# Altium PCB STM32F302VC_EVM.PcbDoc (part 13 of 19)
Units mil, origin at the board's own origin, x right, y up, seen from the top; angles counter-clockwise.
Board outline 3937.01 x 3937.01 mil, 2 copper layers (Top Layer, Bottom Layer); 117 components, 166 nets, 602 pads, 373 vias.
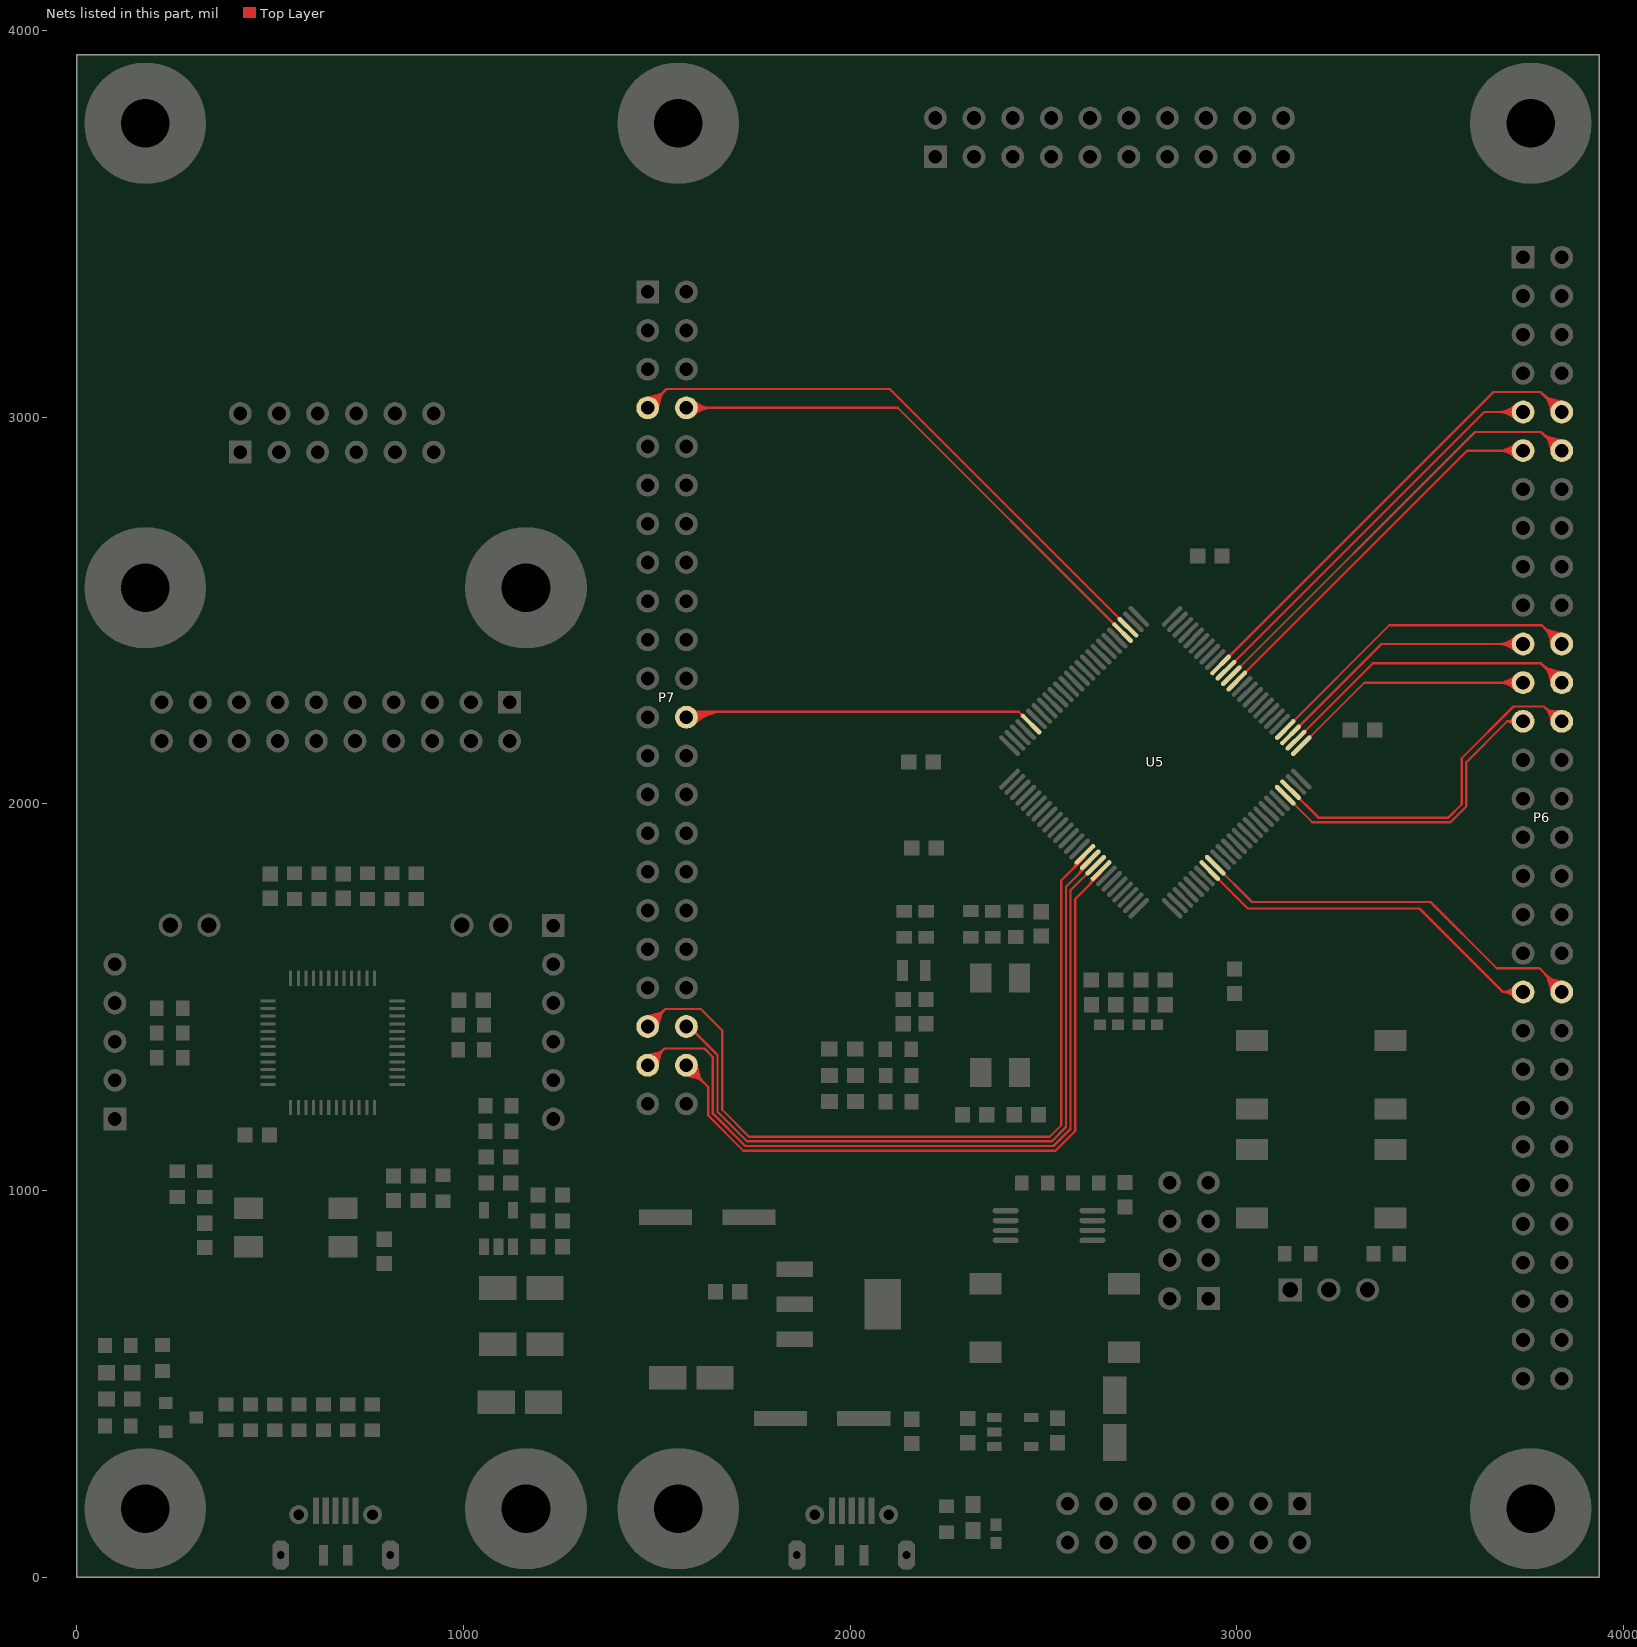
[diagram p13: the nets of this part, all layers, seen from the top]

## Via types
v1: diameter 23.62, hole 11.81, Top Layer to Bottom Layer, tented both sides, 372 vias
v2: diameter 50, hole 28, Top Layer to Bottom Layer, tented both sides, 1 vias

## Nets (pads, with @x,y where several pads share a name; then routed paths per layer and width w, separated by ;. In a path a pad name is that pad's centre, name@x,y a point inside that pad or via, vN(x,y) a via of type N, cw(c..) or ccw(c..) an arc to the next point about the centre after c; other vN are vias at no path point) (continued)
PB9: P7.24 U5.96 | length 2039.9
  Top Layer w6: P7.24@1576.38,2224.02 1590.55,2238.19 2435.75,2238.19 U5.96@2467.83,2206.11 ; P7.24@1578.17,2222.23 cw(c1616.7,2183.7) 1616.7,2238.19 ; P7.24@1578.17,2222.23 cw(c1616.7,2183.7) 1616.7,2238.19 ; P7.24@1578.17,2222.23 cw(c1616.7,2183.7) 1616.7,2238.19 ; P7.24@1582.41,2217.99 cw(c1631.18,2169.21) 1631.18,2238.19 ; P7.24@1582.41,2217.99 cw(c1631.18,2169.21) 1631.18,2238.19 ; P7.24@1582.41,2217.99 cw(c1631.18,2169.21) 1631.18,2238.19 ; P7.24@1586.65,2213.74 cw(c1645.67,2154.73) 1645.67,2238.19 ; P7.24@1586.65,2213.74 cw(c1645.67,2154.73) 1645.67,2238.19 ; P7.24@1586.65,2213.74 cw(c1645.67,2154.73) 1645.67,2238.19 ; P7.24@1590.89,2209.5 cw(c1660.15,2140.24) 1660.15,2238.19 ; P7.24@1590.89,2209.5 cw(c1660.15,2140.24) 1660.15,2238.19 ; P7.24@1590.89,2209.5 cw(c1660.15,2140.24) 1660.15,2238.19 ; P7.24@1595.14,2205.26 cw(c1674.64,2125.76) 1674.64,2238.19 ; P7.24@1595.14,2205.26 cw(c1674.64,2125.76) 1674.64,2238.19 ; P7.24@1595.14,2205.26 cw(c1674.64,2125.76) 1674.64,2238.19 ; P7.24@1595.14,2242.77 ccw(c1606.2,2253.84) 1606.2,2238.19 ; P7.24@1595.14,2242.77 ccw(c1606.2,2253.84) 1606.2,2238.19 ; P7.24@1595.14,2242.77 ccw(c1606.2,2253.84) 1606.2,2238.19 ; P7.24@1602.05,2217.34 cw(c1617.58,2213.3) 1609.45,2227.13 ; P7.24@1602.05,2217.34 cw(c1617.58,2213.3) 1609.45,2227.13 ; P7.24@1602.05,2217.34 cw(c1617.58,2213.3) 1609.45,2227.13 ; P7.24@1602.89,2222.98 cw(c1615.54,2222.49) 1609.21,2233.46 ; P7.24@1602.89,2222.98 cw(c1615.54,2222.49) 1609.21,2233.46 ; P7.24@1602.89,2222.98 cw(c1615.54,2222.49) 1609.21,2233.46 ; 2441.99,2231.95 cw(c2437.03,2226.99) U5.96@2444.05,2226.99 ; 2441.99,2231.95 ccw(c2446.95,2236.91) U5.96@2446.95,2229.9 ; 2441.99,2231.95 ccw(c2446.95,2236.91) U5.96@2446.95,2229.9 ; 2441.99,2231.95 cw(c2437.03,2226.99) U5.96@2444.05,2226.99 ; 2441.99,2231.95 ccw(c2446.95,2236.91) U5.96@2446.95,2229.9 ; 2441.99,2231.95 cw(c2437.03,2226.99) U5.96@2444.05,2226.99
PB10: P6.25 U5.47 | length 1074.3
  Top Layer w6: U5.47@3124.83,2022.37 3194.86,1952.34 3552.12,1952.34 3593.51,1993.73 3593.51,2107.52 3699.37,2213.39 ; P6.25@3740.16,2213.39 3699.37,2213.39 ; U5.47@3145.71,1998.59 cw(c3145.71,1991.58) 3150.67,1996.54 ; U5.47@3145.71,1998.59 cw(c3145.71,1991.58) 3150.67,1996.54 ; U5.47@3145.71,1998.59 cw(c3145.71,1991.58) 3150.67,1996.54 ; U5.47@3148.61,2001.5 ccw(c3155.63,2001.5) 3150.67,1996.54 ; U5.47@3148.61,2001.5 ccw(c3155.63,2001.5) 3150.67,1996.54 ; U5.47@3148.61,2001.5 ccw(c3155.63,2001.5) 3150.67,1996.54 ; 3699.37,2213.39 cw(c3699.37,2195.29) P6.25@3715.91,2202.63 ; 3699.37,2213.39 ccw(c3699.37,2231.48) P6.25@3715.91,2224.14 ; 3699.37,2213.39 ccw(c3699.37,2231.48) P6.25@3715.91,2224.14 ; 3699.37,2213.39 cw(c3699.37,2195.29) P6.25@3715.91,2202.63 ; 3699.37,2213.39 ccw(c3699.37,2231.48) P6.25@3715.91,2224.14 ; 3699.37,2213.39 cw(c3699.37,2195.29) P6.25@3715.91,2202.63 ; 3708.6,2213.39 cw(c3708.6,2199.38) P6.25@3721.39,2205.06 ; 3708.6,2213.39 ccw(c3708.6,2227.39) P6.25@3721.39,2221.71 ; 3708.6,2213.39 ccw(c3708.6,2227.39) P6.25@3721.39,2221.71 ; 3708.6,2213.39 cw(c3708.6,2199.38) P6.25@3721.39,2205.06 ; 3708.6,2213.39 ccw(c3708.6,2227.39) P6.25@3721.39,2221.71 ; 3708.6,2213.39 cw(c3708.6,2199.38) P6.25@3721.39,2205.06
PB11: P6.26 U5.48 | length 1965.5
  Top Layer w6: U5.48@3138.75,2036.29 3210.7,1964.34 3547.15,1964.34 3581.51,1998.7 3581.51,2118.11 3715.31,2251.91 3793.36,2251.91 ; P6.26@3836.02,2209.25 3793.36,2251.91 ; U5.48@3159.63,2012.51 cw(c3159.63,2005.5) 3164.59,2010.46 ; U5.48@3159.63,2012.51 cw(c3159.63,2005.5) 3164.59,2010.46 ; U5.48@3159.63,2012.51 cw(c3159.63,2005.5) 3164.59,2010.46 ; U5.48@3162.53,2015.42 ccw(c3169.55,2015.42) 3164.59,2010.46 ; U5.48@3162.53,2015.42 ccw(c3169.55,2015.42) 3164.59,2010.46 ; U5.48@3162.53,2015.42 ccw(c3169.55,2015.42) 3164.59,2010.46 ; 3793.36,2251.91 ccw(c3825.8,2284.35) P6.26@3834.9,2239.39 ; 3793.36,2251.91 ccw(c3825.8,2284.35) P6.26@3834.9,2239.39 ; 3793.36,2251.91 ccw(c3825.8,2284.35) P6.26@3834.9,2239.39 ; 3800.72,2244.56 cw(c3769.55,2213.39) P6.26@3813.63,2213.39 ; 3800.72,2244.56 cw(c3769.55,2213.39) P6.26@3813.63,2213.39 ; 3800.72,2244.56 cw(c3769.55,2213.39) P6.26@3813.63,2213.39 ; 3801.27,2244.01 ccw(c3828.46,2271.2) P6.26@3836.09,2233.51 ; 3801.27,2244.01 ccw(c3828.46,2271.2) P6.26@3836.09,2233.51 ; 3801.27,2244.01 ccw(c3828.46,2271.2) P6.26@3836.09,2233.51 ; 3807.26,2237.14 ccw(c3842.89,2246.69) P6.26@3839.87,2209.92 ; 3807.26,2237.14 ccw(c3842.89,2246.69) P6.26@3839.87,2209.92 ; 3807.26,2237.14 ccw(c3842.89,2246.69) P6.26@3839.87,2209.92 ; 3809.18,2236.1 ccw(c3831.12,2258.04) P6.26@3837.28,2227.62 ; 3809.18,2236.1 ccw(c3831.12,2258.04) P6.26@3837.28,2227.62 ; 3809.18,2236.1 ccw(c3831.12,2258.04) P6.26@3837.28,2227.62 ; 3809.47,2228.91 ccw(c3842.15,2237.67) P6.26@3839.38,2203.95 ; 3809.47,2228.91 ccw(c3842.15,2237.67) P6.26@3839.38,2203.95 ; 3809.47,2228.91 ccw(c3842.15,2237.67) P6.26@3839.38,2203.95 ; 3810.96,2234.31 cw(c3790.03,2213.39) P6.26@3819.63,2213.39 ; 3810.96,2234.31 cw(c3790.03,2213.39) P6.26@3819.63,2213.39 ; 3810.96,2234.31 cw(c3790.03,2213.39) P6.26@3819.63,2213.39 ; 3816.44,2234.73 cw(c3813.65,2189.99) P6.26@3847.26,2219.65 ; 3816.44,2234.73 cw(c3813.65,2189.99) P6.26@3847.26,2219.65 ; 3816.44,2234.73 cw(c3813.65,2189.99) P6.26@3847.26,2219.65 ; 3817.29,2240.48 cw(c3814.17,2190.45) P6.26@3851.76,2223.63 ; 3817.29,2240.48 cw(c3814.17,2190.45) P6.26@3851.76,2223.63 ; 3817.29,2240.48 cw(c3814.17,2190.45) P6.26@3851.76,2223.63
PB12: P6.23 U5.51 | length 1374.7
  Top Layer w6: U5.51@3166.59,2150.43 3329.54,2313.39 P6.23@3740.16,2313.39 ; U5.51@3187.47,2174.22 ccw(c3187.47,2181.23) 3192.43,2176.27 ; U5.51@3187.47,2174.22 ccw(c3187.47,2181.23) 3192.43,2176.27 ; U5.51@3187.47,2174.22 ccw(c3187.47,2181.23) 3192.43,2176.27 ; U5.51@3190.37,2171.31 cw(c3197.39,2171.31) 3192.43,2176.27 ; U5.51@3190.37,2171.31 cw(c3197.39,2171.31) 3192.43,2176.27 ; U5.51@3190.37,2171.31 cw(c3197.39,2171.31) 3192.43,2176.27 ; 3676.11,2313.39 cw(c3676.11,2249.34) P6.23@3721.4,2294.63 ; 3676.11,2313.39 ccw(c3676.11,2377.43) P6.23@3721.4,2332.14 ; 3676.11,2313.39 ccw(c3676.11,2377.43) P6.23@3721.4,2332.14 ; 3676.11,2313.39 cw(c3676.11,2249.34) P6.23@3721.4,2294.63 ; 3676.11,2313.39 ccw(c3676.11,2377.43) P6.23@3721.4,2332.14 ; 3676.11,2313.39 cw(c3676.11,2249.34) P6.23@3721.4,2294.63 ; 3690.6,2313.39 cw(c3690.6,2263.83) P6.23@3725.64,2298.87 ; 3690.6,2313.39 ccw(c3690.6,2362.94) P6.23@3725.64,2327.9 ; 3690.6,2313.39 ccw(c3690.6,2362.94) P6.23@3725.64,2327.9 ; 3690.6,2313.39 cw(c3690.6,2263.83) P6.23@3725.64,2298.87 ; 3690.6,2313.39 ccw(c3690.6,2362.94) P6.23@3725.64,2327.9 ; 3690.6,2313.39 cw(c3690.6,2263.83) P6.23@3725.64,2298.87 ; 3705.09,2313.39 cw(c3705.09,2278.31) P6.23@3729.89,2303.11 ; 3705.09,2313.39 ccw(c3705.09,2348.46) P6.23@3729.89,2323.66 ; 3705.09,2313.39 ccw(c3705.09,2348.46) P6.23@3729.89,2323.66 ; 3705.09,2313.39 cw(c3705.09,2278.31) P6.23@3729.89,2303.11 ; 3705.09,2313.39 ccw(c3705.09,2348.46) P6.23@3729.89,2323.66 ; 3705.09,2313.39 cw(c3705.09,2278.31) P6.23@3729.89,2303.11
PB13: P6.24 U5.52 | length 2544.3
  Top Layer w6: U5.52@3152.67,2164.35 3351.5,2363.19 3786.42,2363.19 P6.24@3838.19,2311.42 ; U5.52@3173.55,2188.14 ccw(c3173.55,2195.15) 3178.51,2190.19 ; U5.52@3173.55,2188.14 ccw(c3173.55,2195.15) 3178.51,2190.19 ; U5.52@3173.55,2188.14 ccw(c3173.55,2195.15) 3178.51,2190.19 ; U5.52@3176.45,2185.23 cw(c3183.47,2185.23) 3178.51,2190.19 ; U5.52@3176.45,2185.23 cw(c3183.47,2185.23) 3178.51,2190.19 ; U5.52@3176.45,2185.23 cw(c3183.47,2185.23) 3178.51,2190.19 ; 3788.15,2361.45 ccw(c3840.16,2413.46) P6.24@3840.16,2339.91 ; 3788.15,2361.45 ccw(c3840.16,2413.46) P6.24@3840.16,2339.91 ; 3788.15,2361.45 ccw(c3840.16,2413.46) P6.24@3840.16,2339.91 ; 3797.66,2351.95 cw(c3759.09,2313.39) P6.24@3813.63,2313.39 ; 3797.66,2351.95 cw(c3759.09,2313.39) P6.24@3813.63,2313.39 ; 3797.66,2351.95 cw(c3759.09,2313.39) P6.24@3813.63,2313.39 ; 3798.39,2351.21 ccw(c3840.16,2392.98) P6.24@3840.16,2333.91 ; 3798.39,2351.21 ccw(c3840.16,2392.98) P6.24@3840.16,2333.91 ; 3798.39,2351.21 ccw(c3840.16,2392.98) P6.24@3840.16,2333.91 ; 3806.67,2339.36 ccw(c3845.57,2349.78) P6.24@3839.65,2309.95 ; 3806.67,2339.36 ccw(c3845.57,2349.78) P6.24@3839.65,2309.95 ; 3806.67,2339.36 ccw(c3845.57,2349.78) P6.24@3839.65,2309.95 ; 3807.9,2341.71 cw(c3779.58,2313.39) P6.24@3819.63,2313.39 ; 3807.9,2341.71 cw(c3779.58,2313.39) P6.24@3819.63,2313.39 ; 3807.9,2341.71 cw(c3779.58,2313.39) P6.24@3819.63,2313.39 ; 3808.64,2340.97 ccw(c3840.16,2372.49) P6.24@3840.16,2327.91 ; 3808.64,2340.97 ccw(c3840.16,2372.49) P6.24@3840.16,2327.91 ; 3808.64,2340.97 ccw(c3840.16,2372.49) P6.24@3840.16,2327.91 ; 3809.04,2330.53 ccw(c3844.1,2339.92) P6.24@3838.76,2304.02 ; 3809.04,2330.53 ccw(c3844.1,2339.92) P6.24@3838.76,2304.02 ; 3809.04,2330.53 ccw(c3844.1,2339.92) P6.24@3838.76,2304.02 ; 3810.15,2347.96 cw(c3797.97,2302.52) P6.24@3843.52,2314.25 ; 3810.15,2347.96 cw(c3797.97,2302.52) P6.24@3843.52,2314.25 ; 3810.15,2347.96 cw(c3797.97,2302.52) P6.24@3843.52,2314.25 ; 3811.4,2321.7 ccw(c3842.64,2330.07) P6.24@3837.88,2298.08 ; 3811.4,2321.7 ccw(c3842.64,2330.07) P6.24@3837.88,2298.08 ; 3811.4,2321.7 ccw(c3842.64,2330.07) P6.24@3837.88,2298.08 ; 3812.58,2341.3 cw(c3803.7,2308.17) P6.24@3837.66,2313.03 ; 3812.58,2341.3 cw(c3803.7,2308.17) P6.24@3837.66,2313.03 ; 3812.58,2341.3 cw(c3803.7,2308.17) P6.24@3837.66,2313.03 ; 3816.31,2334.3 cw(c3810.96,2314.32) P6.24@3831.63,2313.66 ; 3816.31,2334.3 cw(c3810.96,2314.32) P6.24@3831.63,2313.66 ; 3816.31,2334.3 cw(c3810.96,2314.32) P6.24@3831.63,2313.66 ; 3820.07,2345.3 cw(c3809.4,2305.47) P6.24@3849.33,2315.75 ; 3820.07,2345.3 cw(c3809.4,2305.47) P6.24@3849.33,2315.75 ; 3820.07,2345.3 cw(c3809.4,2305.47) P6.24@3849.33,2315.75 ; 3821.36,2338.95 cw(c3813.48,2309.57) P6.24@3843.6,2313.88 ; 3821.36,2338.95 cw(c3813.48,2309.57) P6.24@3843.6,2313.88 ; 3821.36,2338.95 cw(c3813.48,2309.57) P6.24@3843.6,2313.88 ; 3830,2342.64 cw(c3820.83,2308.41) P6.24@3855.14,2317.24 ; 3830,2342.64 cw(c3820.83,2308.41) P6.24@3855.14,2317.24 ; 3830,2342.64 cw(c3820.83,2308.41) P6.24@3855.14,2317.24
PB14: P6.21 U5.53 | length 1432.5
  Top Layer w6: U5.53@3138.75,2178.27 3373.86,2413.39 P6.21@3740.16,2413.39 ; U5.53@3159.63,2202.06 ccw(c3159.63,2209.07) 3164.59,2204.11 ; U5.53@3159.63,2202.06 ccw(c3159.63,2209.07) 3164.59,2204.11 ; U5.53@3159.63,2202.06 ccw(c3159.63,2209.07) 3164.59,2204.11 ; U5.53@3162.53,2199.15 cw(c3169.55,2199.15) 3164.59,2204.11 ; U5.53@3162.53,2199.15 cw(c3169.55,2199.15) 3164.59,2204.11 ; U5.53@3162.53,2199.15 cw(c3169.55,2199.15) 3164.59,2204.11 ; 3676.11,2413.39 cw(c3676.11,2349.34) P6.21@3721.4,2394.63 ; 3676.11,2413.39 ccw(c3676.11,2477.43) P6.21@3721.4,2432.14 ; 3676.11,2413.39 ccw(c3676.11,2477.43) P6.21@3721.4,2432.14 ; 3676.11,2413.39 cw(c3676.11,2349.34) P6.21@3721.4,2394.63 ; 3676.11,2413.39 ccw(c3676.11,2477.43) P6.21@3721.4,2432.14 ; 3676.11,2413.39 cw(c3676.11,2349.34) P6.21@3721.4,2394.63 ; 3690.6,2413.39 cw(c3690.6,2363.83) P6.21@3725.64,2398.87 ; 3690.6,2413.39 ccw(c3690.6,2462.94) P6.21@3725.64,2427.9 ; 3690.6,2413.39 ccw(c3690.6,2462.94) P6.21@3725.64,2427.9 ; 3690.6,2413.39 cw(c3690.6,2363.83) P6.21@3725.64,2398.87 ; 3690.6,2413.39 ccw(c3690.6,2462.94) P6.21@3725.64,2427.9 ; 3690.6,2413.39 cw(c3690.6,2363.83) P6.21@3725.64,2398.87 ; 3705.09,2413.39 cw(c3705.09,2378.31) P6.21@3729.89,2403.11 ; 3705.09,2413.39 ccw(c3705.09,2448.46) P6.21@3729.89,2423.66 ; 3705.09,2413.39 ccw(c3705.09,2448.46) P6.21@3729.89,2423.66 ; 3705.09,2413.39 cw(c3705.09,2378.31) P6.21@3729.89,2403.11 ; 3705.09,2413.39 ccw(c3705.09,2448.46) P6.21@3729.89,2423.66 ; 3705.09,2413.39 cw(c3705.09,2378.31) P6.21@3729.89,2403.11
PB15: P6.22 U5.54 | length 2705.8
  Top Layer w6: U5.54@3124.83,2192.19 3394.25,2461.61 3788.39,2461.61 P6.22@3838.39,2411.61 ; U5.54@3145.71,2215.98 ccw(c3145.71,2222.99) 3150.67,2218.03 ; U5.54@3145.71,2215.98 ccw(c3145.71,2222.99) 3150.67,2218.03 ; U5.54@3145.71,2215.98 ccw(c3145.71,2222.99) 3150.67,2218.03 ; U5.54@3148.61,2213.07 cw(c3155.63,2213.07) 3150.67,2218.03 ; U5.54@3148.61,2213.07 cw(c3155.63,2213.07) 3150.67,2218.03 ; U5.54@3148.61,2213.07 cw(c3155.63,2213.07) 3150.67,2218.03 ; 3788.82,2461.18 ccw(c3840.16,2512.51) P6.22@3840.16,2439.91 ; 3788.82,2461.18 ccw(c3840.16,2512.51) P6.22@3840.16,2439.91 ; 3788.82,2461.18 ccw(c3840.16,2512.51) P6.22@3840.16,2439.91 ; 3797.38,2452.62 cw(c3758.14,2413.39) P6.22@3813.63,2413.39 ; 3797.38,2452.62 cw(c3758.14,2413.39) P6.22@3813.63,2413.39 ; 3797.38,2452.62 cw(c3758.14,2413.39) P6.22@3813.63,2413.39 ; 3799.07,2450.93 ccw(c3840.16,2492.03) P6.22@3840.16,2433.91 ; 3799.07,2450.93 ccw(c3840.16,2492.03) P6.22@3840.16,2433.91 ; 3799.07,2450.93 ccw(c3840.16,2492.03) P6.22@3840.16,2433.91 ; 3806.62,2439.56 ccw(c3845.82,2450.07) P6.22@3839.63,2409.95 ; 3806.62,2439.56 ccw(c3845.82,2450.07) P6.22@3839.63,2409.95 ; 3806.62,2439.56 ccw(c3845.82,2450.07) P6.22@3839.63,2409.95 ; 3807.62,2442.38 cw(c3778.63,2413.39) P6.22@3819.63,2413.39 ; 3807.62,2442.38 cw(c3778.63,2413.39) P6.22@3819.63,2413.39 ; 3807.62,2442.38 cw(c3778.63,2413.39) P6.22@3819.63,2413.39 ; 3809,2430.68 ccw(c3844.29,2440.13) P6.22@3838.71,2404.02 ; 3809,2430.68 ccw(c3844.29,2440.13) P6.22@3838.71,2404.02 ; 3809,2430.68 ccw(c3844.29,2440.13) P6.22@3838.71,2404.02 ; 3809.31,2440.69 ccw(c3840.16,2471.54) P6.22@3840.16,2427.91 ; 3809.31,2440.69 ccw(c3840.16,2471.54) P6.22@3840.16,2427.91 ; 3809.31,2440.69 ccw(c3840.16,2471.54) P6.22@3840.16,2427.91 ; 3810.35,2447.9 cw(c3798.27,2402.82) P6.22@3843.52,2414.24 ; 3810.35,2447.9 cw(c3798.27,2402.82) P6.22@3843.52,2414.24 ; 3810.35,2447.9 cw(c3798.27,2402.82) P6.22@3843.52,2414.24 ; 3811.38,2421.79 ccw(c3842.75,2430.2) P6.22@3837.8,2398.09 ; 3811.38,2421.79 ccw(c3842.75,2430.2) P6.22@3837.8,2398.09 ; 3811.38,2421.79 ccw(c3842.75,2430.2) P6.22@3837.8,2398.09 ; 3812.8,2441.24 cw(c3804.02,2408.45) P6.22@3837.65,2413.04 ; 3812.8,2441.24 cw(c3804.02,2408.45) P6.22@3837.65,2413.04 ; 3812.8,2441.24 cw(c3804.02,2408.45) P6.22@3837.65,2413.04 ; 3813.41,2436.61 ccw(c3840.38,2443.84) P6.22@3840.18,2415.91 ; 3813.41,2436.61 ccw(c3840.38,2443.84) P6.22@3840.18,2415.91 ; 3813.41,2436.61 ccw(c3840.38,2443.84) P6.22@3840.18,2415.91 ; 3816.58,2434.23 cw(c3811.31,2414.58) P6.22@3831.64,2413.74 ; 3816.58,2434.23 cw(c3811.31,2414.58) P6.22@3831.64,2413.74 ; 3816.58,2434.23 cw(c3811.31,2414.58) P6.22@3831.64,2413.74 ; 3820.22,2445.26 cw(c3809.61,2405.68) P6.22@3849.34,2415.7 ; 3820.22,2445.26 cw(c3809.61,2405.68) P6.22@3849.34,2415.7 ; 3820.22,2445.26 cw(c3809.61,2405.68) P6.22@3849.34,2415.7 ; 3821.52,2438.91 cw(c3813.72,2409.78) P6.22@3843.6,2413.86 ; 3821.52,2438.91 cw(c3813.72,2409.78) P6.22@3843.6,2413.86 ; 3821.52,2438.91 cw(c3813.72,2409.78) P6.22@3843.6,2413.86 ; 3830.09,2442.61 cw(c3820.96,2408.54) P6.22@3855.16,2417.17 ; 3830.09,2442.61 cw(c3820.96,2408.54) P6.22@3855.16,2417.17 ; 3830.09,2442.61 cw(c3820.96,2408.54) P6.22@3855.16,2417.17
PC0: P7.39 U5.15 | length 4113.3
  Top Layer w6: P7.39@1476.38,1424.02 1521.85,1469.49 1613.44,1469.49 1668.87,1414.05 1668.87,1208.81 1738.57,1139.11 2516.14,1139.11 2545.92,1168.89 2545.92,1801.4 2607.03,1862.5 U5.15@2607.03,1869.26 ; 2581.52,1839.79 ccw(c2576.16,1845.16) U5.15@2583.38,1847.49 ; P7.39@1461.22,1427.12 cw(c1494.37,1420.33) 1485.61,1453.02 ; P7.39@1461.22,1427.12 cw(c1494.37,1420.33) 1485.61,1453.02 ; P7.39@1461.22,1427.12 cw(c1494.37,1420.33) 1485.61,1453.02 ; P7.39@1467.1,1425.92 cw(c1505.01,1418.15) 1494.99,1455.53 ; P7.39@1467.1,1425.92 cw(c1505.01,1418.15) 1494.99,1455.53 ; P7.39@1467.1,1425.92 cw(c1505.01,1418.15) 1494.99,1455.53 ; P7.39@1472.92,1424.27 cw(c1500.72,1422.2) 1493.5,1449.13 ; P7.39@1472.92,1424.27 cw(c1500.72,1422.2) 1493.5,1449.13 ; P7.39@1472.92,1424.27 cw(c1500.72,1422.2) 1493.5,1449.13 ; P7.39@1472.98,1424.71 cw(c1515.64,1415.98) 1504.37,1458.04 ; P7.39@1472.98,1424.71 cw(c1515.64,1415.98) 1504.37,1458.04 ; P7.39@1472.98,1424.71 cw(c1515.64,1415.98) 1504.37,1458.04 ; P7.39@1476.19,1426.54 ccw(c1473.9,1457.29) 1503.68,1449.31 ; P7.39@1476.19,1426.54 ccw(c1473.9,1457.29) 1503.68,1449.31 ; P7.39@1476.19,1426.54 ccw(c1473.9,1457.29) 1503.68,1449.31 ; P7.39@1476.38,1438.54 ccw(c1476.38,1473.62) 1501.18,1448.82 ; P7.39@1476.38,1438.54 ccw(c1476.38,1473.62) 1501.18,1448.82 ; P7.39@1476.38,1438.54 ccw(c1476.38,1473.62) 1501.18,1448.82 ; P7.39@1476.38,1444.54 ccw(c1476.38,1494.1) 1511.42,1459.06 ; P7.39@1476.38,1444.54 ccw(c1476.38,1494.1) 1511.42,1459.06 ; P7.39@1476.38,1444.54 ccw(c1476.38,1494.1) 1511.42,1459.06 ; P7.39@1476.38,1450.54 ccw(c1476.38,1514.59) 1521.66,1469.3 ; P7.39@1476.38,1450.54 ccw(c1476.38,1514.59) 1521.66,1469.3 ; P7.39@1476.38,1450.54 ccw(c1476.38,1514.59) 1521.66,1469.3 ; P7.39@1476.64,1420.55 ccw(c1474.56,1448.36) 1501.49,1441.14 ; P7.39@1476.64,1420.55 ccw(c1474.56,1448.36) 1501.49,1441.14 ; P7.39@1476.64,1420.55 ccw(c1474.56,1448.36) 1501.49,1441.14 ; P7.39@1477.07,1420.61 ccw(c1468.34,1463.28) 1510.41,1452.01 ; P7.39@1477.07,1420.61 ccw(c1468.34,1463.28) 1510.41,1452.01 ; P7.39@1477.07,1420.61 ccw(c1468.34,1463.28) 1510.41,1452.01 ; P7.39@1478.28,1414.74 ccw(c1470.52,1452.65) 1507.89,1442.63 ; P7.39@1478.28,1414.74 ccw(c1470.52,1452.65) 1507.89,1442.63 ; P7.39@1478.28,1414.74 ccw(c1470.52,1452.65) 1507.89,1442.63 ; P7.39@1478.9,1423.83 cw(c1509.65,1421.53) 1501.67,1451.32 ; P7.39@1478.9,1423.83 cw(c1509.65,1421.53) 1501.67,1451.32 ; P7.39@1478.9,1423.83 cw(c1509.65,1421.53) 1501.67,1451.32 ; P7.39@1479.48,1408.86 ccw(c1472.69,1442.01) 1505.38,1433.25 ; P7.39@1479.48,1408.86 ccw(c1472.69,1442.01) 1505.38,1433.25 ; P7.39@1479.48,1408.86 ccw(c1472.69,1442.01) 1505.38,1433.25 ; P7.39@1490.91,1424.02 cw(c1525.98,1424.02) 1501.18,1448.82 ; P7.39@1490.91,1424.02 cw(c1525.98,1424.02) 1501.18,1448.82 ; P7.39@1490.91,1424.02 cw(c1525.98,1424.02) 1501.18,1448.82 ; P7.39@1496.91,1424.02 cw(c1546.46,1424.02) 1511.42,1459.06 ; P7.39@1496.91,1424.02 cw(c1546.46,1424.02) 1511.42,1459.06 ; P7.39@1496.91,1424.02 cw(c1546.46,1424.02) 1511.42,1459.06 ; P7.39@1502.91,1424.02 cw(c1566.95,1424.02) 1521.66,1469.3 ; P7.39@1502.91,1424.02 cw(c1566.95,1424.02) 1521.66,1469.3 ; P7.39@1502.91,1424.02 cw(c1566.95,1424.02) 1521.66,1469.3 ; 2576.41,1831.88 ccw(c2559.91,1848.38) U5.15@2583.24,1848.38 ; 2576.41,1831.88 ccw(c2559.91,1848.38) U5.15@2583.24,1848.38 ; 2576.41,1831.88 ccw(c2559.91,1848.38) U5.15@2583.24,1848.38 ; 2579.87,1835.79 cw(c2595.9,1831.49) U5.15@2587.6,1845.87 ; 2579.87,1835.79 cw(c2595.9,1831.49) U5.15@2587.6,1845.87 ; 2579.87,1835.79 cw(c2595.9,1831.49) U5.15@2587.6,1845.87 ; 2586.65,1842.13 ccw(c2580.39,1848.38) U5.15@2589.24,1848.38 ; 2586.65,1842.13 ccw(c2580.39,1848.38) U5.15@2589.24,1848.38 ; 2586.65,1842.13 ccw(c2580.39,1848.38) U5.15@2589.24,1848.38
PC1: P7.40 U5.16 | length 2046.3
  Top Layer w6: P7.40@1576.38,1424.02 1583.11,1424.02 1656.87,1350.25 1656.87,1203.84 1733.6,1127.11 2521.11,1127.11 2557.92,1163.92 2557.92,1785.56 2620.94,1848.58 U5.16@2620.94,1855.34 ; 2595.44,1825.87 ccw(c2590.08,1831.24) U5.16@2597.3,1833.57 ; 2590.33,1817.96 ccw(c2573.83,1834.46) U5.16@2597.16,1834.46 ; 2590.33,1817.96 ccw(c2573.83,1834.46) U5.16@2597.16,1834.46 ; 2590.33,1817.96 ccw(c2573.83,1834.46) U5.16@2597.16,1834.46 ; 2593.79,1821.87 cw(c2609.82,1817.57) U5.16@2601.52,1831.95 ; 2593.79,1821.87 cw(c2609.82,1817.57) U5.16@2601.52,1831.95 ; 2593.79,1821.87 cw(c2609.82,1817.57) U5.16@2601.52,1831.95 ; 2600.57,1828.21 ccw(c2594.31,1834.46) U5.16@2603.16,1834.46 ; 2600.57,1828.21 ccw(c2594.31,1834.46) U5.16@2603.16,1834.46 ; 2600.57,1828.21 ccw(c2594.31,1834.46) U5.16@2603.16,1834.46
PC2: P7.41 U5.17 | length 3706
  Top Layer w6: P7.41@1476.38,1324.02 1519.49,1367.13 1623.03,1367.13 1644.68,1345.47 1644.68,1272.87 1644.87,1272.68 1644.87,1198.87 1728.63,1115.11 2526.08,1115.11 2569.92,1158.95 2569.92,1776.48 U5.17@2634.86,1841.42 ; P7.41@1461.52,1328.35 cw(c1495.42,1318.46) 1487.5,1352.87 ; P7.41@1461.52,1328.35 cw(c1495.42,1318.46) 1487.5,1352.87 ; P7.41@1461.52,1328.35 cw(c1495.42,1318.46) 1487.5,1352.87 ; P7.41@1467.28,1326.67 cw(c1506.68,1315.18) 1497.47,1355.17 ; P7.41@1467.28,1326.67 cw(c1506.68,1315.18) 1497.47,1355.17 ; P7.41@1467.28,1326.67 cw(c1506.68,1315.18) 1497.47,1355.17 ; P7.41@1472.95,1324.57 cw(c1502.25,1319.87) 1495.59,1348.79 ; P7.41@1472.95,1324.57 cw(c1502.25,1319.87) 1495.59,1348.79 ; P7.41@1472.95,1324.57 cw(c1502.25,1319.87) 1495.59,1348.79 ; P7.41@1473.04,1324.99 cw(c1517.93,1311.9) 1507.44,1357.46 ; P7.41@1473.04,1324.99 cw(c1517.93,1311.9) 1507.44,1357.46 ; P7.41@1473.04,1324.99 cw(c1517.93,1311.9) 1507.44,1357.46 ; P7.41@1476.89,1338.53 ccw(c1478,1369.61) 1499.99,1347.62 ; P7.41@1476.89,1338.53 ccw(c1478,1369.61) 1499.99,1347.62 ; P7.41@1476.89,1338.53 ccw(c1478,1369.61) 1499.99,1347.62 ; P7.41@1476.93,1320.59 ccw(c1472.23,1349.89) 1501.15,1343.23 ; P7.41@1476.93,1320.59 ccw(c1472.23,1349.89) 1501.15,1343.23 ; P7.41@1476.93,1320.59 ccw(c1472.23,1349.89) 1501.15,1343.23 ; P7.41@1477.11,1344.53 ccw(c1478.66,1388.45) 1509.74,1357.37 ; P7.41@1477.11,1344.53 ccw(c1478.66,1388.45) 1509.74,1357.37 ; P7.41@1477.11,1344.53 ccw(c1478.66,1388.45) 1509.74,1357.37 ; P7.41@1477.32,1350.53 ccw(c1479.33,1407.28) 1519.49,1367.12 ; P7.41@1477.32,1350.53 ccw(c1479.33,1407.28) 1519.49,1367.12 ; P7.41@1477.32,1350.53 ccw(c1479.33,1407.28) 1519.49,1367.12 ; P7.41@1477.35,1320.68 ccw(c1464.26,1365.57) 1509.83,1355.08 ; P7.41@1477.35,1320.68 ccw(c1464.26,1365.57) 1509.83,1355.08 ; P7.41@1477.35,1320.68 ccw(c1464.26,1365.57) 1509.83,1355.08 ; P7.41@1479.03,1314.92 ccw(c1467.54,1354.32) 1507.53,1345.11 ; P7.41@1479.03,1314.92 ccw(c1467.54,1354.32) 1507.53,1345.11 ; P7.41@1479.03,1314.92 ccw(c1467.54,1354.32) 1507.53,1345.11 ; P7.41@1480.71,1309.16 ccw(c1470.82,1343.06) 1505.23,1335.14 ; P7.41@1480.71,1309.16 ccw(c1470.82,1343.06) 1505.23,1335.14 ; P7.41@1480.71,1309.16 ccw(c1470.82,1343.06) 1505.23,1335.14 ; P7.41@1490.9,1324.53 cw(c1521.98,1325.63) 1499.99,1347.62 ; P7.41@1490.9,1324.53 cw(c1521.98,1325.63) 1499.99,1347.62 ; P7.41@1490.9,1324.53 cw(c1521.98,1325.63) 1499.99,1347.62 ; P7.41@1496.89,1324.74 cw(c1540.81,1326.3) 1509.74,1357.37 ; P7.41@1496.89,1324.74 cw(c1540.81,1326.3) 1509.74,1357.37 ; P7.41@1496.89,1324.74 cw(c1540.81,1326.3) 1509.74,1357.37 ; P7.41@1502.89,1324.96 cw(c1559.64,1326.97) 1519.49,1367.12 ; P7.41@1502.89,1324.96 cw(c1559.64,1326.97) 1519.49,1367.12 ; P7.41@1502.89,1324.96 cw(c1559.64,1326.97) 1519.49,1367.12 ; 2609.03,1815.58 cw(c2613.99,1810.62) U5.17@2613.99,1817.64 ; 2609.03,1815.58 ccw(c2604.07,1820.54) U5.17@2611.08,1820.54 ; 2609.03,1815.58 ccw(c2604.07,1820.54) U5.17@2611.08,1820.54 ; 2609.03,1815.58 cw(c2613.99,1810.62) U5.17@2613.99,1817.64 ; 2609.03,1815.58 ccw(c2604.07,1820.54) U5.17@2611.08,1820.54 ; 2609.03,1815.58 cw(c2613.99,1810.62) U5.17@2613.99,1817.64
PC3: P7.42 U5.18 | length 3892.3
  Top Layer w6: P7.42@1576.38,1324.02 1632.87,1267.52 1632.87,1193.9 1723.66,1103.11 2531.05,1103.11 2581.92,1153.98 2581.92,1753.88 2648.78,1820.74 U5.18@2648.78,1827.5 ; 2623.28,1798.03 ccw(c2617.92,1803.4) U5.18@2625.14,1805.73 ; P7.42@1561.22,1320.91 ccw(c1594.37,1327.7) 1585.61,1295.01 ; P7.42@1561.22,1320.91 ccw(c1594.37,1327.7) 1585.61,1295.01 ; P7.42@1561.22,1320.91 ccw(c1594.37,1327.7) 1585.61,1295.01 ; P7.42@1567.1,1322.12 ccw(c1605.01,1329.88) 1594.99,1292.5 ; P7.42@1567.1,1322.12 ccw(c1605.01,1329.88) 1594.99,1292.5 ; P7.42@1567.1,1322.12 ccw(c1605.01,1329.88) 1594.99,1292.5 ; P7.42@1572.92,1323.76 ccw(c1600.72,1325.83) 1593.5,1298.9 ; P7.42@1572.92,1323.76 ccw(c1600.72,1325.83) 1593.5,1298.9 ; P7.42@1572.92,1323.76 ccw(c1600.72,1325.83) 1593.5,1298.9 ; P7.42@1572.98,1323.32 ccw(c1615.64,1332.06) 1604.37,1289.99 ; P7.42@1572.98,1323.32 ccw(c1615.64,1332.06) 1604.37,1289.99 ; P7.42@1572.98,1323.32 ccw(c1615.64,1332.06) 1604.37,1289.99 ; P7.42@1576.19,1321.5 cw(c1573.9,1290.74) 1603.68,1298.73 ; P7.42@1576.19,1321.5 cw(c1573.9,1290.74) 1603.68,1298.73 ; P7.42@1576.19,1321.5 cw(c1573.9,1290.74) 1603.68,1298.73 ; P7.42@1576.38,1297.49 cw(c1576.38,1233.45) 1621.66,1278.73 ; P7.42@1576.38,1297.49 cw(c1576.38,1233.45) 1621.66,1278.73 ; P7.42@1576.38,1297.49 cw(c1576.38,1233.45) 1621.66,1278.73 ; P7.42@1576.38,1303.49 cw(c1576.38,1253.93) 1611.42,1288.97 ; P7.42@1576.38,1303.49 cw(c1576.38,1253.93) 1611.42,1288.97 ; P7.42@1576.38,1303.49 cw(c1576.38,1253.93) 1611.42,1288.97 ; P7.42@1576.38,1309.49 cw(c1576.38,1274.42) 1601.18,1299.22 ; P7.42@1576.38,1309.49 cw(c1576.38,1274.42) 1601.18,1299.22 ; P7.42@1576.38,1309.49 cw(c1576.38,1274.42) 1601.18,1299.22 ; P7.42@1576.64,1327.48 cw(c1574.56,1299.67) 1601.49,1306.89 ; P7.42@1576.64,1327.48 cw(c1574.56,1299.67) 1601.49,1306.89 ; P7.42@1576.64,1327.48 cw(c1574.56,1299.67) 1601.49,1306.89 ; P7.42@1577.07,1327.42 cw(c1568.34,1284.75) 1610.41,1296.02 ; P7.42@1577.07,1327.42 cw(c1568.34,1284.75) 1610.41,1296.02 ; P7.42@1577.07,1327.42 cw(c1568.34,1284.75) 1610.41,1296.02 ; P7.42@1578.28,1333.3 cw(c1570.52,1295.39) 1607.89,1305.4 ; P7.42@1578.28,1333.3 cw(c1570.52,1295.39) 1607.89,1305.4 ; P7.42@1578.28,1333.3 cw(c1570.52,1295.39) 1607.89,1305.4 ; P7.42@1578.9,1324.2 ccw(c1609.65,1326.5) 1601.67,1296.71 ; P7.42@1578.9,1324.2 ccw(c1609.65,1326.5) 1601.67,1296.71 ; P7.42@1578.9,1324.2 ccw(c1609.65,1326.5) 1601.67,1296.71 ; P7.42@1579.48,1339.17 cw(c1572.69,1306.02) 1605.38,1314.78 ; P7.42@1579.48,1339.17 cw(c1572.69,1306.02) 1605.38,1314.78 ; P7.42@1579.48,1339.17 cw(c1572.69,1306.02) 1605.38,1314.78 ; P7.42@1590.91,1324.02 ccw(c1625.98,1324.02) 1601.18,1299.22 ; P7.42@1590.91,1324.02 ccw(c1625.98,1324.02) 1601.18,1299.22 ; P7.42@1590.91,1324.02 ccw(c1625.98,1324.02) 1601.18,1299.22 ; P7.42@1596.91,1324.02 ccw(c1646.46,1324.02) 1611.42,1288.97 ; P7.42@1596.91,1324.02 ccw(c1646.46,1324.02) 1611.42,1288.97 ; P7.42@1596.91,1324.02 ccw(c1646.46,1324.02) 1611.42,1288.97 ; P7.42@1602.91,1324.02 ccw(c1666.95,1324.02) 1621.66,1278.73 ; P7.42@1602.91,1324.02 ccw(c1666.95,1324.02) 1621.66,1278.73 ; P7.42@1602.91,1324.02 ccw(c1666.95,1324.02) 1621.66,1278.73 ; 2618.17,1790.13 ccw(c2601.67,1806.62) U5.18@2625,1806.62 ; 2618.17,1790.13 ccw(c2601.67,1806.62) U5.18@2625,1806.62 ; 2618.17,1790.13 ccw(c2601.67,1806.62) U5.18@2625,1806.62 ; 2621.62,1794.03 cw(c2637.66,1789.73) U5.18@2629.36,1804.11 ; 2621.62,1794.03 cw(c2637.66,1789.73) U5.18@2629.36,1804.11 ; 2621.62,1794.03 cw(c2637.66,1789.73) U5.18@2629.36,1804.11 ; 2628.41,1800.37 ccw(c2622.15,1806.62) U5.18@2631,1806.62 ; 2628.41,1800.37 ccw(c2622.15,1806.62) U5.18@2631,1806.62 ; 2628.41,1800.37 ccw(c2622.15,1806.62) U5.18@2631,1806.62
PC4: P6.39 U5.33 | length 1354.1
  Top Layer w6: U5.33@2929.96,1827.5 3028.13,1729.33 3472.05,1729.33 3687.99,1513.39 ; P6.39@3740.16,1513.39 3687.99,1513.39 ; U5.33@2950.84,1803.72 cw(c2950.84,1796.7) 2955.8,1801.66 ; U5.33@2950.84,1803.72 cw(c2950.84,1796.7) 2955.8,1801.66 ; U5.33@2950.84,1803.72 cw(c2950.84,1796.7) 2955.8,1801.66 ; U5.33@2953.74,1806.62 ccw(c2960.76,1806.62) 2955.8,1801.66 ; U5.33@2953.74,1806.62 ccw(c2960.76,1806.62) 2955.8,1801.66 ; U5.33@2953.74,1806.62 ccw(c2960.76,1806.62) 2955.8,1801.66 ; 3687.99,1513.39 cw(c3687.99,1475.36) P6.39@3718.72,1497.76 ; 3687.99,1513.39 ccw(c3687.99,1551.41) P6.39@3718.72,1529.01 ; 3687.99,1513.39 ccw(c3687.99,1551.41) P6.39@3718.72,1529.01 ; 3687.99,1513.39 cw(c3687.99,1475.36) P6.39@3718.72,1497.76 ; 3687.99,1513.39 ccw(c3687.99,1551.41) P6.39@3718.72,1529.01 ; 3687.99,1513.39 cw(c3687.99,1475.36) P6.39@3718.72,1497.76 ; 3699.79,1513.39 cw(c3699.79,1483.96) P6.39@3723.57,1501.29 ; 3699.79,1513.39 ccw(c3699.79,1542.81) P6.39@3723.57,1525.48 ; 3699.79,1513.39 ccw(c3699.79,1542.81) P6.39@3723.57,1525.48 ; 3699.79,1513.39 cw(c3699.79,1483.96) P6.39@3723.57,1501.29 ; 3699.79,1513.39 ccw(c3699.79,1542.81) P6.39@3723.57,1525.48 ; 3699.79,1513.39 cw(c3699.79,1483.96) P6.39@3723.57,1501.29
PC5: P6.40 U5.34 | length 2895.4
  Top Layer w6: U5.34@2943.88,1841.42 3039.23,1746.06 3500.83,1746.06 3672.03,1574.86 3782.47,1574.86 P6.40@3842.05,1515.28 ; U5.34@2964.75,1817.64 cw(c2964.75,1810.62) 2969.71,1815.58 ; U5.34@2964.75,1817.64 cw(c2964.75,1810.62) 2969.71,1815.58 ; U5.34@2964.75,1817.64 cw(c2964.75,1810.62) 2969.71,1815.58 ; U5.34@2967.66,1820.54 ccw(c2974.67,1820.54) 2969.71,1815.58 ; U5.34@2967.66,1820.54 ccw(c2974.67,1820.54) 2969.71,1815.58 ; U5.34@2967.66,1820.54 ccw(c2974.67,1820.54) 2969.71,1815.58 ; 3792.19,1565.14 cw(c3740.44,1513.39) P6.40@3813.63,1513.39 ; 3792.19,1565.14 cw(c3740.44,1513.39) P6.40@3813.63,1513.39 ; 3792.19,1565.14 cw(c3740.44,1513.39) P6.40@3813.63,1513.39 ; 3801.34,1555.99 ccw(c3840.16,1594.81) P6.40@3840.16,1539.91 ; 3801.34,1555.99 ccw(c3840.16,1594.81) P6.40@3840.16,1539.91 ; 3801.34,1555.99 ccw(c3840.16,1594.81) P6.40@3840.16,1539.91 ; 3802.44,1554.9 cw(c3760.92,1513.39) P6.40@3819.63,1513.39 ; 3802.44,1554.9 cw(c3760.92,1513.39) P6.40@3819.63,1513.39 ; 3802.44,1554.9 cw(c3760.92,1513.39) P6.40@3819.63,1513.39 ; 3805.61,1543.32 ccw(c3850.91,1555.46) P6.40@3839.3,1510.02 ; 3805.61,1543.32 ccw(c3850.91,1555.46) P6.40@3839.3,1510.02 ; 3805.61,1543.32 ccw(c3850.91,1555.46) P6.40@3839.3,1510.02 ; 3808.26,1533.42 ccw(c3848,1544.06) P6.40@3837.81,1504.21 ; 3808.26,1533.42 ccw(c3848,1544.06) P6.40@3837.81,1504.21 ; 3808.26,1533.42 ccw(c3848,1544.06) P6.40@3837.81,1504.21 ; 3810.92,1523.51 ccw(c3845.08,1532.67) P6.40@3836.33,1498.4 ; 3810.92,1523.51 ccw(c3845.08,1532.67) P6.40@3836.33,1498.4 ; 3810.92,1523.51 ccw(c3845.08,1532.67) P6.40@3836.33,1498.4 ; 3811.58,1545.75 ccw(c3840.16,1574.32) P6.40@3840.16,1533.91 ; 3811.58,1545.75 ccw(c3840.16,1574.32) P6.40@3840.16,1533.91 ; 3811.58,1545.75 ccw(c3840.16,1574.32) P6.40@3840.16,1533.91 ; 3812.26,1540.88 ccw(c3845.27,1549.73) P6.40@3840.51,1515.89 ; 3812.26,1540.88 ccw(c3845.27,1549.73) P6.40@3840.51,1515.89 ; 3812.26,1540.88 ccw(c3845.27,1549.73) P6.40@3840.51,1515.89 ; 3812.68,1544.65 cw(c3781.41,1513.39) P6.40@3825.63,1513.39 ; 3812.68,1544.65 cw(c3781.41,1513.39) P6.40@3825.63,1513.39 ; 3812.68,1544.65 cw(c3781.41,1513.39) P6.40@3825.63,1513.39 ; 3814.11,1546.89 cw(c3803.65,1507.88) P6.40@3843.59,1513.9 ; 3814.11,1546.89 cw(c3803.65,1507.88) P6.40@3843.59,1513.9 ; 3814.11,1546.89 cw(c3803.65,1507.88) P6.40@3843.59,1513.9 ; 3814.61,1532.12 ccw(c3843.9,1539.97) P6.40@3839.67,1509.95 ; 3814.61,1532.12 ccw(c3843.9,1539.97) P6.40@3839.67,1509.95 ; 3814.61,1532.12 ccw(c3843.9,1539.97) P6.40@3839.67,1509.95 ; 3817.07,1540.1 cw(c3809.9,1513.31) P6.40@3837.63,1513.38 ; 3817.07,1540.1 cw(c3809.9,1513.31) P6.40@3837.63,1513.38 ; 3817.07,1540.1 cw(c3809.9,1513.31) P6.40@3837.63,1513.38 ; 3819.27,1537.13 ccw(c3839.12,1542.45) P6.40@3839.85,1521.91 ; 3819.27,1537.13 ccw(c3839.12,1542.45) P6.40@3839.85,1521.91 ; 3819.27,1537.13 ccw(c3839.12,1542.45) P6.40@3839.85,1521.91 ; 3822.96,1544.52 cw(c3813.54,1509.37) P6.40@3849.52,1514.8 ; 3822.96,1544.52 cw(c3813.54,1509.37) P6.40@3849.52,1514.8 ; 3822.96,1544.52 cw(c3813.54,1509.37) P6.40@3849.52,1514.8 ; 3831.81,1542.15 cw(c3823.43,1510.86) P6.40@3855.46,1515.69 ; 3831.81,1542.15 cw(c3823.43,1510.86) P6.40@3855.46,1515.69 ; 3831.81,1542.15 cw(c3823.43,1510.86) P6.40@3855.46,1515.69
PC6: P6.11 U5.63 | length 1721.1
  Top Layer w6: U5.63@2999.55,2317.47 3595.47,2913.39 P6.11@3740.16,2913.39 ; U5.63@3020.43,2341.25 ccw(c3020.43,2348.27) 3025.39,2343.31 ; U5.63@3020.43,2341.25 ccw(c3020.43,2348.27) 3025.39,2343.31 ; U5.63@3020.43,2341.25 ccw(c3020.43,2348.27) 3025.39,2343.31 ; U5.63@3023.34,2338.35 cw(c3030.35,2338.35) 3025.39,2343.31 ; U5.63@3023.34,2338.35 cw(c3030.35,2338.35) 3025.39,2343.31 ; U5.63@3023.34,2338.35 cw(c3030.35,2338.35) 3025.39,2343.31 ; 3676.11,2913.39 cw(c3676.11,2849.34) P6.11@3721.4,2894.63 ; 3676.11,2913.39 ccw(c3676.11,2977.43) P6.11@3721.4,2932.14 ; 3676.11,2913.39 ccw(c3676.11,2977.43) P6.11@3721.4,2932.14 ; 3676.11,2913.39 cw(c3676.11,2849.34) P6.11@3721.4,2894.63 ; 3676.11,2913.39 ccw(c3676.11,2977.43) P6.11@3721.4,2932.14 ; 3676.11,2913.39 cw(c3676.11,2849.34) P6.11@3721.4,2894.63 ; 3690.6,2913.39 cw(c3690.6,2863.83) P6.11@3725.64,2898.87 ; 3690.6,2913.39 ccw(c3690.6,2962.94) P6.11@3725.64,2927.9 ; 3690.6,2913.39 ccw(c3690.6,2962.94) P6.11@3725.64,2927.9 ; 3690.6,2913.39 cw(c3690.6,2863.83) P6.11@3725.64,2898.87 ; 3690.6,2913.39 ccw(c3690.6,2962.94) P6.11@3725.64,2927.9 ; 3690.6,2913.39 cw(c3690.6,2863.83) P6.11@3725.64,2898.87 ; 3705.09,2913.39 cw(c3705.09,2878.31) P6.11@3729.89,2903.11 ; 3705.09,2913.39 ccw(c3705.09,2948.46) P6.11@3729.89,2923.66 ; 3705.09,2913.39 ccw(c3705.09,2948.46) P6.11@3729.89,2923.66 ; 3705.09,2913.39 cw(c3705.09,2878.31) P6.11@3729.89,2903.11 ; 3705.09,2913.39 ccw(c3705.09,2948.46) P6.11@3729.89,2923.66 ; 3705.09,2913.39 cw(c3705.09,2878.31) P6.11@3729.89,2903.11
PC7: P6.12 U5.64 | length 3014.6
  Top Layer w6: U5.64@2985.63,2331.39 3615.86,2961.61 3786.42,2961.61 ; P6.12@3837.4,2910.63 3786.42,2961.61 ; U5.64@3006.51,2355.17 ccw(c3006.51,2362.19) 3011.47,2357.23 ; U5.64@3006.51,2355.17 ccw(c3006.51,2362.19) 3011.47,2357.23 ; U5.64@3006.51,2355.17 ccw(c3006.51,2362.19) 3011.47,2357.23 ; U5.64@3009.42,2352.27 cw(c3016.43,2352.27) 3011.47,2357.23 ; U5.64@3009.42,2352.27 cw(c3016.43,2352.27) 3011.47,2357.23 ; U5.64@3009.42,2352.27 cw(c3016.43,2352.27) 3011.47,2357.23 ; 3786.42,2961.61 ccw(c3838.83,3014.02) P6.12@3839.81,2939.91 ; 3786.42,2961.61 ccw(c3838.83,3014.02) P6.12@3839.81,2939.91 ; 3786.42,2961.61 ccw(c3838.83,3014.02) P6.12@3839.81,2939.91 ; 3796.47,2951.56 ccw(c3839.09,2994.17) P6.12@3839.89,2933.91 ; 3796.47,2951.56 ccw(c3839.09,2994.17) P6.12@3839.89,2933.91 ; 3796.47,2951.56 ccw(c3839.09,2994.17) P6.12@3839.89,2933.91 ; 3798.77,2949.26 cw(c3762.89,2913.39) P6.12@3813.63,2913.39 ; 3798.77,2949.26 cw(c3762.89,2913.39) P6.12@3813.63,2913.39 ; 3798.77,2949.26 cw(c3762.89,2913.39) P6.12@3813.63,2913.39 ; 3806.53,2941.5 ccw(c3839.35,2974.33) P6.12@3839.97,2927.91 ; 3806.53,2941.5 ccw(c3839.35,2974.33) P6.12@3839.97,2927.91 ; 3806.53,2941.5 ccw(c3839.35,2974.33) P6.12@3839.97,2927.91 ; 3806.89,2938.55 ccw(c3844.57,2948.65) P6.12@3839.73,2909.94 ; 3806.89,2938.55 ccw(c3844.57,2948.65) P6.12@3839.73,2909.94 ; 3806.89,2938.55 ccw(c3844.57,2948.65) P6.12@3839.73,2909.94 ; 3808.4,2947.88 cw(c3796.26,2900.04) P6.12@3843.48,2914.4 ; 3808.4,2947.88 cw(c3796.26,2900.04) P6.12@3843.48,2914.4 ; 3808.4,2947.88 cw(c3796.26,2900.04) P6.12@3843.48,2914.4 ; 3809.01,2939.02 cw(c3783.38,2913.39) P6.12@3819.63,2913.39 ; 3809.01,2939.02 cw(c3783.38,2913.39) P6.12@3819.63,2913.39 ; 3809.01,2939.02 cw(c3783.38,2913.39) P6.12@3819.63,2913.39 ; 3809.19,2929.94 ccw(c3843.37,2939.1) P6.12@3838.98,2903.99 ; 3809.19,2929.94 ccw(c3843.37,2939.1) P6.12@3838.98,2903.99 ; 3809.19,2929.94 ccw(c3843.37,2939.1) P6.12@3838.98,2903.99 ; 3810.89,2941.27 cw(c3801.93,2905.98) P6.12@3837.68,2912.91 ; 3810.89,2941.27 cw(c3801.93,2905.98) P6.12@3837.68,2912.91 ; 3810.89,2941.27 cw(c3801.93,2905.98) P6.12@3837.68,2912.91 ; 3811.5,2921.33 ccw(c3842.18,2929.55) P6.12@3838.24,2898.03 ; 3811.5,2921.33 ccw(c3842.18,2929.55) P6.12@3838.24,2898.03 ; 3811.5,2921.33 ccw(c3842.18,2929.55) P6.12@3838.24,2898.03 ; 3814.37,2934.41 ccw(c3818.34,2950.05) P6.12@3826.59,2936.18 ; 3814.37,2934.41 ccw(c3818.34,2950.05) P6.12@3826.59,2936.18 ; 3814.37,2934.41 ccw(c3818.34,2950.05) P6.12@3826.59,2936.18 ; 3814.69,2934.33 cw(c3809.15,2912.53) P6.12@3831.63,2913.15 ; 3814.69,2934.33 cw(c3809.15,2912.53) P6.12@3831.63,2913.15 ; 3814.69,2934.33 cw(c3809.15,2912.53) P6.12@3831.63,2913.15 ; 3816.58,2931.45 ccw(c3839.61,2954.48) P6.12@3840.04,2921.91 ; 3816.58,2931.45 ccw(c3839.61,2954.48) P6.12@3840.04,2921.91 ; 3816.58,2931.45 ccw(c3839.61,2954.48) P6.12@3840.04,2921.91 ; 3818.71,2945.27 cw(c3808.15,2903.66) P6.12@3849.22,2916.14 ; 3818.71,2945.27 cw(c3808.15,2903.66) P6.12@3849.22,2916.14 ; 3818.71,2945.27 cw(c3808.15,2903.66) P6.12@3849.22,2916.14 ; 3820.05,2938.95 cw(c3812.19,2907.97) P6.12@3843.57,2914.05 ; 3820.05,2938.95 cw(c3812.19,2907.97) P6.12@3843.57,2914.05 ; 3820.05,2938.95 cw(c3812.19,2907.97) P6.12@3843.57,2914.05 ; 3829.02,2942.65 cw(c3820.04,2907.27) P6.12@3854.96,2917.88 ; 3829.02,2942.65 cw(c3820.04,2907.27) P6.12@3854.96,2917.88 ; 3829.02,2942.65 cw(c3820.04,2907.27) P6.12@3854.96,2917.88
PC8: P6.9 U5.65 | length 1778.8
  Top Layer w6: U5.65@2971.71,2345.31 3639.79,3013.39 P6.9@3740.16,3013.39 ; U5.65@2992.59,2369.09 ccw(c2992.59,2376.1) 2997.55,2371.14 ; U5.65@2992.59,2369.09 ccw(c2992.59,2376.1) 2997.55,2371.14 ; U5.65@2992.59,2369.09 ccw(c2992.59,2376.1) 2997.55,2371.14 ; U5.65@2995.5,2366.18 cw(c3002.51,2366.18) 2997.55,2371.14 ; U5.65@2995.5,2366.18 cw(c3002.51,2366.18) 2997.55,2371.14 ; U5.65@2995.5,2366.18 cw(c3002.51,2366.18) 2997.55,2371.14 ; 3676.11,3013.39 cw(c3676.11,2949.34) P6.9@3721.4,2994.63 ; 3676.11,3013.39 ccw(c3676.11,3077.43) P6.9@3721.4,3032.14 ; 3676.11,3013.39 ccw(c3676.11,3077.43) P6.9@3721.4,3032.14 ; 3676.11,3013.39 cw(c3676.11,2949.34) P6.9@3721.4,2994.63 ; 3676.11,3013.39 ccw(c3676.11,3077.43) P6.9@3721.4,3032.14 ; 3676.11,3013.39 cw(c3676.11,2949.34) P6.9@3721.4,2994.63 ; 3690.6,3013.39 cw(c3690.6,2963.83) P6.9@3725.64,2998.87 ; 3690.6,3013.39 ccw(c3690.6,3062.94) P6.9@3725.64,3027.9 ; 3690.6,3013.39 ccw(c3690.6,3062.94) P6.9@3725.64,3027.9 ; 3690.6,3013.39 cw(c3690.6,2963.83) P6.9@3725.64,2998.87 ; 3690.6,3013.39 ccw(c3690.6,3062.94) P6.9@3725.64,3027.9 ; 3690.6,3013.39 cw(c3690.6,2963.83) P6.9@3725.64,2998.87 ; 3705.09,3013.39 cw(c3705.09,2978.31) P6.9@3729.89,3003.11 ; 3705.09,3013.39 ccw(c3705.09,3048.46) P6.9@3729.89,3023.66 ; 3705.09,3013.39 ccw(c3705.09,3048.46) P6.9@3729.89,3023.66 ; 3705.09,3013.39 cw(c3705.09,2978.31) P6.9@3729.89,3003.11 ; 3705.09,3013.39 ccw(c3705.09,3048.46) P6.9@3729.89,3023.66 ; 3705.09,3013.39 cw(c3705.09,2978.31) P6.9@3729.89,3003.11
PC9: P6.10 U5.66 | length 3034.6
  Top Layer w6: U5.66@2957.8,2359.22 3663.53,3064.96 3785.43,3064.96 P6.10@3838.58,3011.81 ; U5.66@2978.67,2383.01 ccw(c2978.67,2390.02) 2983.63,2385.06 ; U5.66@2978.67,2383.01 ccw(c2978.67,2390.02) 2983.63,2385.06 ; U5.66@2978.67,2383.01 ccw(c2978.67,2390.02) 2983.63,2385.06 ; U5.66@2981.58,2380.1 cw(c2988.59,2380.1) 2983.63,2385.06 ; U5.66@2981.58,2380.1 cw(c2988.59,2380.1) 2983.63,2385.06 ; U5.66@2981.58,2380.1 cw(c2988.59,2380.1) 2983.63,2385.06 ; 3789.5,3060.9 ccw(c3840.16,3111.56) P6.10@3840.16,3039.91 ; 3789.5,3060.9 ccw(c3840.16,3111.56) P6.10@3840.16,3039.91 ; 3789.5,3060.9 ccw(c3840.16,3111.56) P6.10@3840.16,3039.91 ; 3797.1,3053.29 cw(c3757.19,3013.39) P6.10@3813.63,3013.39 ; 3797.1,3053.29 cw(c3757.19,3013.39) P6.10@3813.63,3013.39 ; 3797.1,3053.29 cw(c3757.19,3013.39) P6.10@3813.63,3013.39 ; 3799.74,3050.66 ccw(c3840.16,3091.07) P6.10@3840.16,3033.91 ; 3799.74,3050.66 ccw(c3840.16,3091.07) P6.10@3840.16,3033.91 ; 3799.74,3050.66 ccw(c3840.16,3091.07) P6.10@3840.16,3033.91 ; 3806.56,3039.76 ccw(c3846.08,3050.35) P6.10@3839.61,3009.96 ; 3806.56,3039.76 ccw(c3846.08,3050.35) P6.10@3839.61,3009.96 ; 3806.56,3039.76 ccw(c3846.08,3050.35) P6.10@3839.61,3009.96 ; 3807.34,3043.05 cw(c3777.68,3013.39) P6.10@3819.63,3013.39 ; 3807.34,3043.05 cw(c3777.68,3013.39) P6.10@3819.63,3013.39 ; 3807.34,3043.05 cw(c3777.68,3013.39) P6.10@3819.63,3013.39 ; 3808.96,3030.82 ccw(c3844.47,3040.34) P6.10@3838.66,3004.03 ; 3808.96,3030.82 ccw(c3844.47,3040.34) P6.10@3838.66,3004.03 ; 3808.96,3030.82 ccw(c3844.47,3040.34) P6.10@3838.66,3004.03 ; 3809.98,3040.41 ccw(c3840.16,3070.59) P6.10@3840.16,3027.91 ; 3809.98,3040.41 ccw(c3840.16,3070.59) P6.10@3840.16,3027.91 ; 3809.98,3040.41 ccw(c3840.16,3070.59) P6.10@3840.16,3027.91 ; 3810.55,3047.85 cw(c3798.56,3003.1) P6.10@3843.53,3014.22 ; 3810.55,3047.85 cw(c3798.56,3003.1) P6.10@3843.53,3014.22 ; 3810.55,3047.85 cw(c3798.56,3003.1) P6.10@3843.53,3014.22 ; 3811.35,3021.88 ccw(c3842.87,3030.33) P6.10@3837.71,2998.11 ; 3811.35,3021.88 ccw(c3842.87,3030.33) P6.10@3837.71,2998.11 ; 3811.35,3021.88 ccw(c3842.87,3030.33) P6.10@3837.71,2998.11 ; 3813.03,3041.18 cw(c3804.34,3008.74) P6.10@3837.65,3013.06 ; 3813.03,3041.18 cw(c3804.34,3008.74) P6.10@3837.65,3013.06 ; 3813.03,3041.18 cw(c3804.34,3008.74) P6.10@3837.65,3013.06 ; 3813.34,3036.84 ccw(c3840.62,3044.15) P6.10@3840.2,3015.91 ; 3813.34,3036.84 ccw(c3840.62,3044.15) P6.10@3840.2,3015.91 ; 3813.34,3036.84 ccw(c3840.62,3044.15) P6.10@3840.2,3015.91 ; 3817.58,3032.81 cw(c3798.16,3013.39) P6.10@3825.63,3013.39 ; 3817.58,3032.81 cw(c3798.16,3013.39) P6.10@3825.63,3013.39 ; 3817.58,3032.81 cw(c3798.16,3013.39) P6.10@3825.63,3013.39 ; 3820.37,3045.22 cw(c3809.83,3005.89) P6.10@3849.35,3015.66 ; 3820.37,3045.22 cw(c3809.83,3005.89) P6.10@3849.35,3015.66 ; 3820.37,3045.22 cw(c3809.83,3005.89) P6.10@3849.35,3015.66 ; 3821.69,3038.86 cw(c3813.95,3009.98) P6.10@3843.6,3013.83 ; 3821.69,3038.86 cw(c3813.95,3009.98) P6.10@3843.6,3013.83 ; 3821.69,3038.86 cw(c3813.95,3009.98) P6.10@3843.6,3013.83 ; 3830.18,3042.59 cw(c3821.1,3008.67) P6.10@3855.18,3017.1 ; 3830.18,3042.59 cw(c3821.1,3008.67) P6.10@3855.18,3017.1 ; 3830.18,3042.59 cw(c3821.1,3008.67) P6.10@3855.18,3017.1
PC10: P7.7 U5.78 | length 3457.1
  Top Layer w6: P7.7@1476.38,3024.02 1525.2,3072.83 2102.21,3072.83 U5.78@2718.38,2456.66 ; P7.7@1461.22,3027.12 cw(c1494.37,3020.33) 1485.61,3053.02 ; P7.7@1461.22,3027.12 cw(c1494.37,3020.33) 1485.61,3053.02 ; P7.7@1461.22,3027.12 cw(c1494.37,3020.33) 1485.61,3053.02 ; P7.7@1467.1,3025.92 cw(c1505.01,3018.15) 1494.99,3055.53 ; P7.7@1467.1,3025.92 cw(c1505.01,3018.15) 1494.99,3055.53 ; P7.7@1467.1,3025.92 cw(c1505.01,3018.15) 1494.99,3055.53 ; P7.7@1472.92,3024.27 cw(c1500.72,3022.2) 1493.5,3049.13 ; P7.7@1472.92,3024.27 cw(c1500.72,3022.2) 1493.5,3049.13 ; P7.7@1472.92,3024.27 cw(c1500.72,3022.2) 1493.5,3049.13 ; P7.7@1472.98,3024.71 cw(c1515.64,3015.98) 1504.37,3058.04 ; P7.7@1472.98,3024.71 cw(c1515.64,3015.98) 1504.37,3058.04 ; P7.7@1472.98,3024.71 cw(c1515.64,3015.98) 1504.37,3058.04 ; P7.7@1476.19,3026.54 ccw(c1473.9,3057.29) 1503.68,3049.31 ; P7.7@1476.19,3026.54 ccw(c1473.9,3057.29) 1503.68,3049.31 ; P7.7@1476.19,3026.54 ccw(c1473.9,3057.29) 1503.68,3049.31 ; P7.7@1476.38,3038.54 ccw(c1476.38,3073.62) 1501.18,3048.82 ; P7.7@1476.38,3038.54 ccw(c1476.38,3073.62) 1501.18,3048.82 ; P7.7@1476.38,3038.54 ccw(c1476.38,3073.62) 1501.18,3048.82 ; P7.7@1476.38,3044.54 ccw(c1476.38,3094.1) 1511.42,3059.06 ; P7.7@1476.38,3044.54 ccw(c1476.38,3094.1) 1511.42,3059.06 ; P7.7@1476.38,3044.54 ccw(c1476.38,3094.1) 1511.42,3059.06 ; P7.7@1476.38,3050.54 ccw(c1476.38,3114.59) 1521.66,3069.3 ; P7.7@1476.38,3050.54 ccw(c1476.38,3114.59) 1521.66,3069.3 ; P7.7@1476.38,3050.54 ccw(c1476.38,3114.59) 1521.66,3069.3 ; P7.7@1476.64,3020.55 ccw(c1474.56,3048.36) 1501.49,3041.14 ; P7.7@1476.64,3020.55 ccw(c1474.56,3048.36) 1501.49,3041.14 ; P7.7@1476.64,3020.55 ccw(c1474.56,3048.36) 1501.49,3041.14 ; P7.7@1477.07,3020.61 ccw(c1468.34,3063.28) 1510.41,3052.01 ; P7.7@1477.07,3020.61 ccw(c1468.34,3063.28) 1510.41,3052.01 ; P7.7@1477.07,3020.61 ccw(c1468.34,3063.28) 1510.41,3052.01 ; P7.7@1478.28,3014.74 ccw(c1470.52,3052.65) 1507.89,3042.63 ; P7.7@1478.28,3014.74 ccw(c1470.52,3052.65) 1507.89,3042.63 ; P7.7@1478.28,3014.74 ccw(c1470.52,3052.65) 1507.89,3042.63 ; P7.7@1478.9,3023.83 cw(c1509.65,3021.53) 1501.67,3051.32 ; P7.7@1478.9,3023.83 cw(c1509.65,3021.53) 1501.67,3051.32 ; P7.7@1478.9,3023.83 cw(c1509.65,3021.53) 1501.67,3051.32 ; P7.7@1479.48,3008.86 ccw(c1472.69,3042.01) 1505.38,3033.25 ; P7.7@1479.48,3008.86 ccw(c1472.69,3042.01) 1505.38,3033.25 ; P7.7@1479.48,3008.86 ccw(c1472.69,3042.01) 1505.38,3033.25 ; P7.7@1490.91,3024.02 cw(c1525.98,3024.02) 1501.18,3048.82 ; P7.7@1490.91,3024.02 cw(c1525.98,3024.02) 1501.18,3048.82 ; P7.7@1490.91,3024.02 cw(c1525.98,3024.02) 1501.18,3048.82 ; P7.7@1496.91,3024.02 cw(c1546.46,3024.02) 1511.42,3059.06 ; P7.7@1496.91,3024.02 cw(c1546.46,3024.02) 1511.42,3059.06 ; P7.7@1496.91,3024.02 cw(c1546.46,3024.02) 1511.42,3059.06 ; P7.7@1502.91,3024.02 cw(c1566.95,3024.02) 1521.66,3069.3 ; P7.7@1502.91,3024.02 cw(c1566.95,3024.02) 1521.66,3069.3 ; P7.7@1502.91,3024.02 cw(c1566.95,3024.02) 1521.66,3069.3 ; 2692.54,2482.5 cw(c2687.58,2477.54) U5.78@2694.6,2477.54 ; 2692.54,2482.5 ccw(c2697.5,2487.46) U5.78@2697.5,2480.45 ; 2692.54,2482.5 ccw(c2697.5,2487.46) U5.78@2697.5,2480.45 ; 2692.54,2482.5 cw(c2687.58,2477.54) U5.78@2694.6,2477.54 ; 2692.54,2482.5 ccw(c2697.5,2487.46) U5.78@2697.5,2480.45 ; 2692.54,2482.5 cw(c2687.58,2477.54) U5.78@2694.6,2477.54
PC11: P7.8 U5.79 | length 2102.5
  Top Layer w6: P7.8@1576.38,3024.02 2123.19,3024.02 U5.79@2704.46,2442.74 ; P7.8@1586.65,3013.74 cw(c1611.45,2988.94) 1611.45,3024.02 ; P7.8@1586.65,3013.74 cw(c1611.45,2988.94) 1611.45,3024.02 ; P7.8@1586.65,3013.74 cw(c1611.45,2988.94) 1611.45,3024.02 ; P7.8@1586.65,3034.29 ccw(c1611.45,3059.09) 1611.45,3024.02 ; P7.8@1586.65,3034.29 ccw(c1611.45,3059.09) 1611.45,3024.02 ; P7.8@1586.65,3034.29 ccw(c1611.45,3059.09) 1611.45,3024.02 ; P7.8@1590.89,3009.5 cw(c1625.93,2974.46) 1625.93,3024.02 ; P7.8@1590.89,3009.5 cw(c1625.93,2974.46) 1625.93,3024.02 ; P7.8@1590.89,3009.5 cw(c1625.93,2974.46) 1625.93,3024.02 ; P7.8@1590.89,3038.53 ccw(c1625.94,3073.57) 1625.94,3024.02 ; P7.8@1590.89,3038.53 ccw(c1625.94,3073.57) 1625.94,3024.02 ; P7.8@1590.89,3038.53 ccw(c1625.94,3073.57) 1625.94,3024.02 ; P7.8@1595.14,3005.26 cw(c1640.42,2959.97) 1640.42,3024.02 ; P7.8@1595.14,3005.26 cw(c1640.42,2959.97) 1640.42,3024.02 ; P7.8@1595.14,3005.26 cw(c1640.42,2959.97) 1640.42,3024.02 ; P7.8@1595.14,3042.77 ccw(c1640.42,3088.06) 1640.42,3024.02 ; P7.8@1595.14,3042.77 ccw(c1640.42,3088.06) 1640.42,3024.02 ; P7.8@1595.14,3042.77 ccw(c1640.42,3088.06) 1640.42,3024.02 ; 2678.62,2468.58 cw(c2673.66,2463.62) U5.79@2680.68,2463.62 ; 2678.62,2468.58 ccw(c2683.58,2473.54) U5.79@2683.58,2466.53 ; 2678.62,2468.58 ccw(c2683.58,2473.54) U5.79@2683.58,2466.53 ; 2678.62,2468.58 cw(c2673.66,2463.62) U5.79@2680.68,2463.62 ; 2678.62,2468.58 ccw(c2683.58,2473.54) U5.79@2683.58,2466.53 ; 2678.62,2468.58 cw(c2673.66,2463.62) U5.79@2680.68,2463.62